# Altium PCB NODE_PCB.PcbDoc
Units mm, origin at the board's own origin, x right, y up, seen from the top; angles counter-clockwise.
Board outline 50 x 50 mm, 4 copper layers (L1 (Signal), L2 (GND), L3 (+3V3), L4 (Signal)), stack 1.586 mm thick; 70 components, 43 nets, 244 pads, 96 vias.
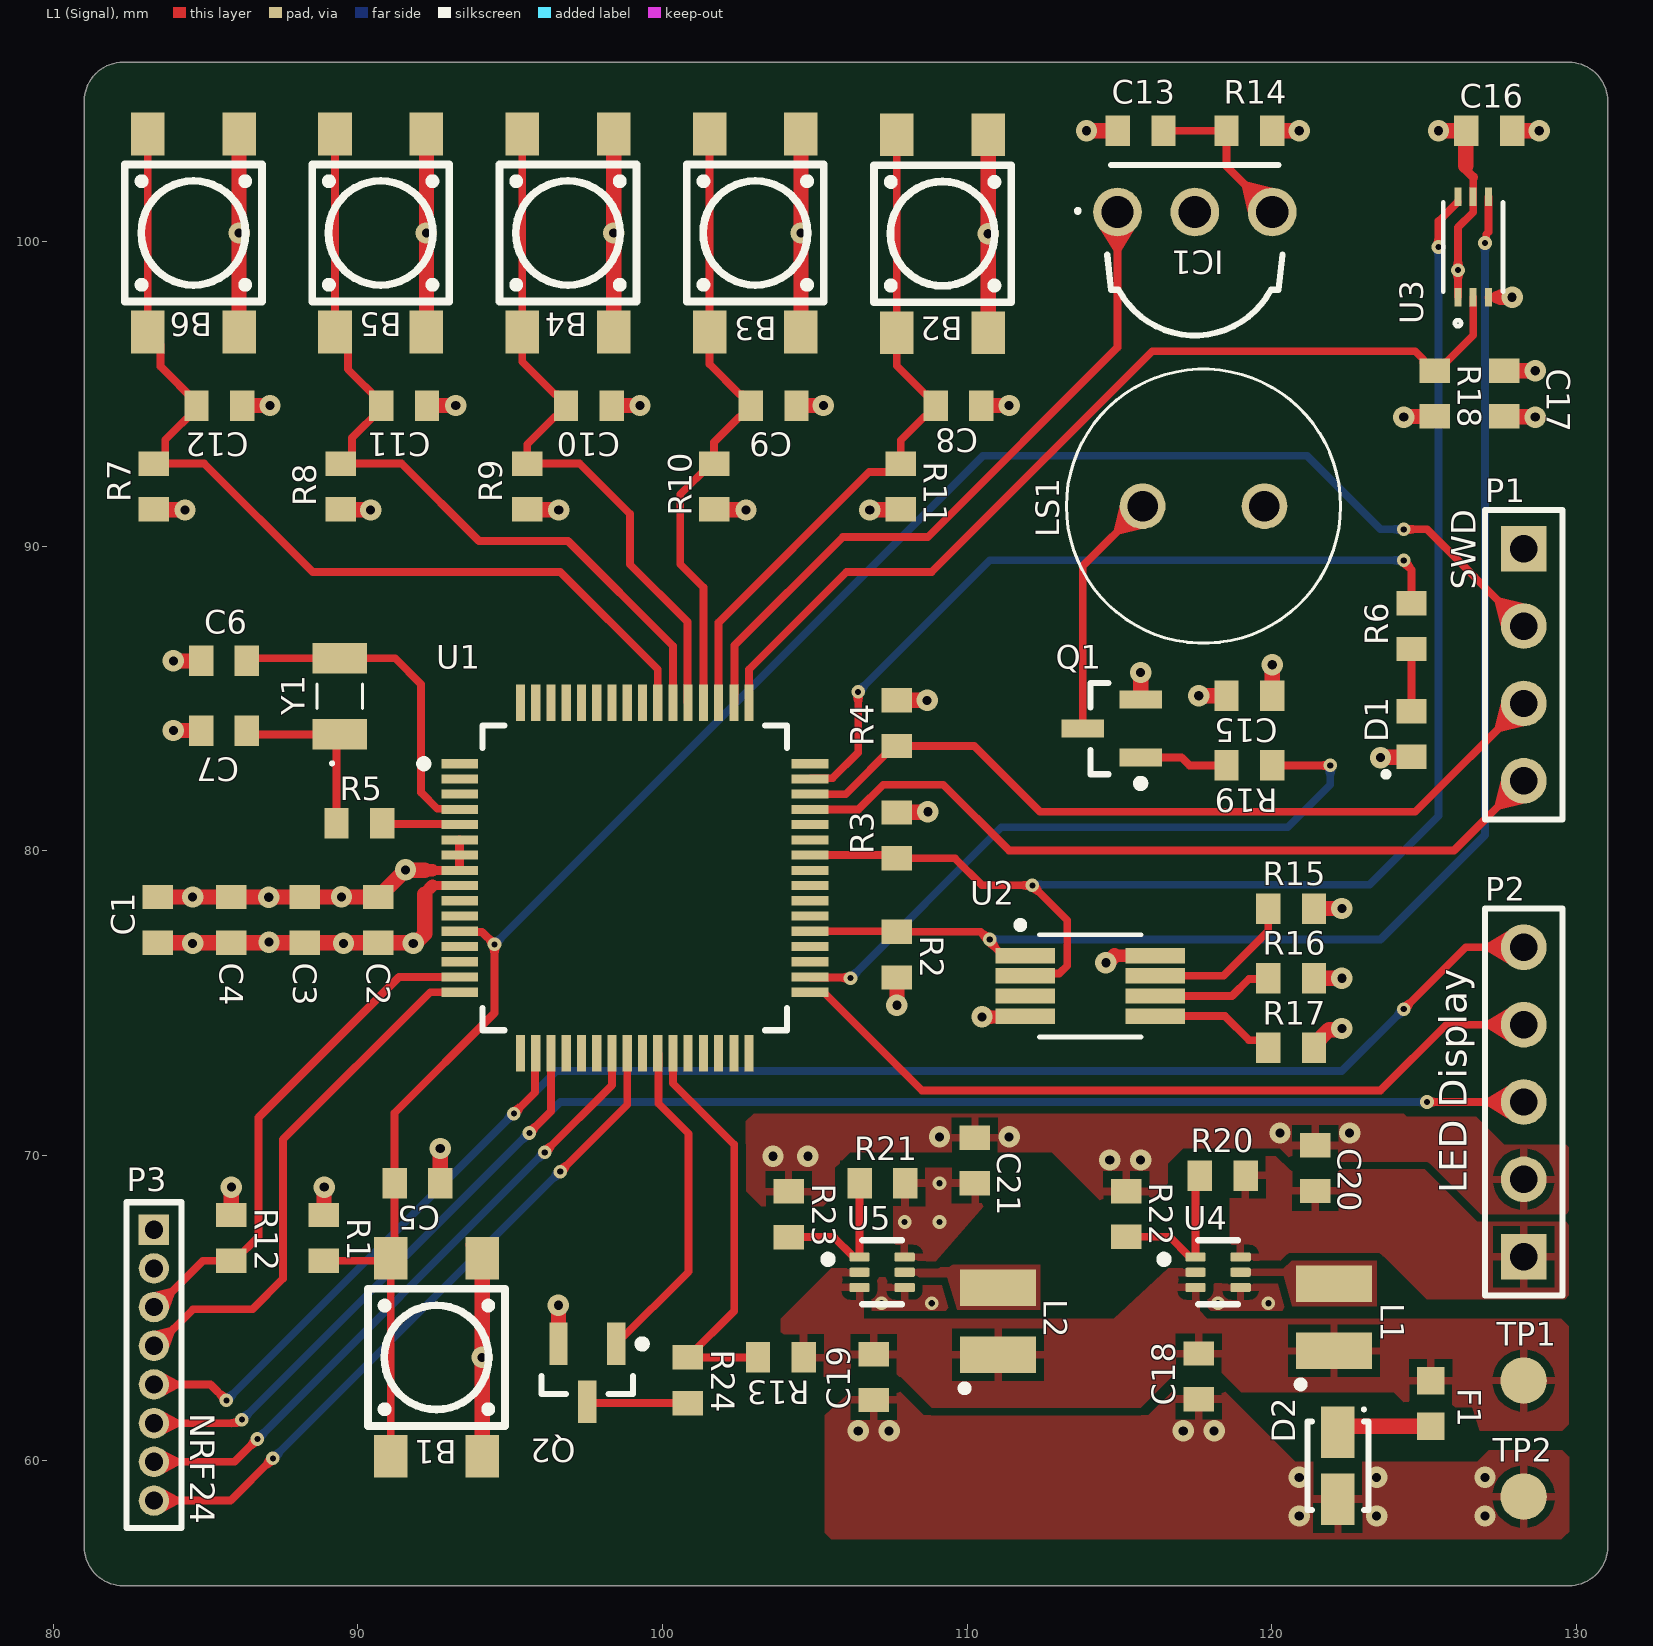
[diagram p0: L1 (Signal) view]
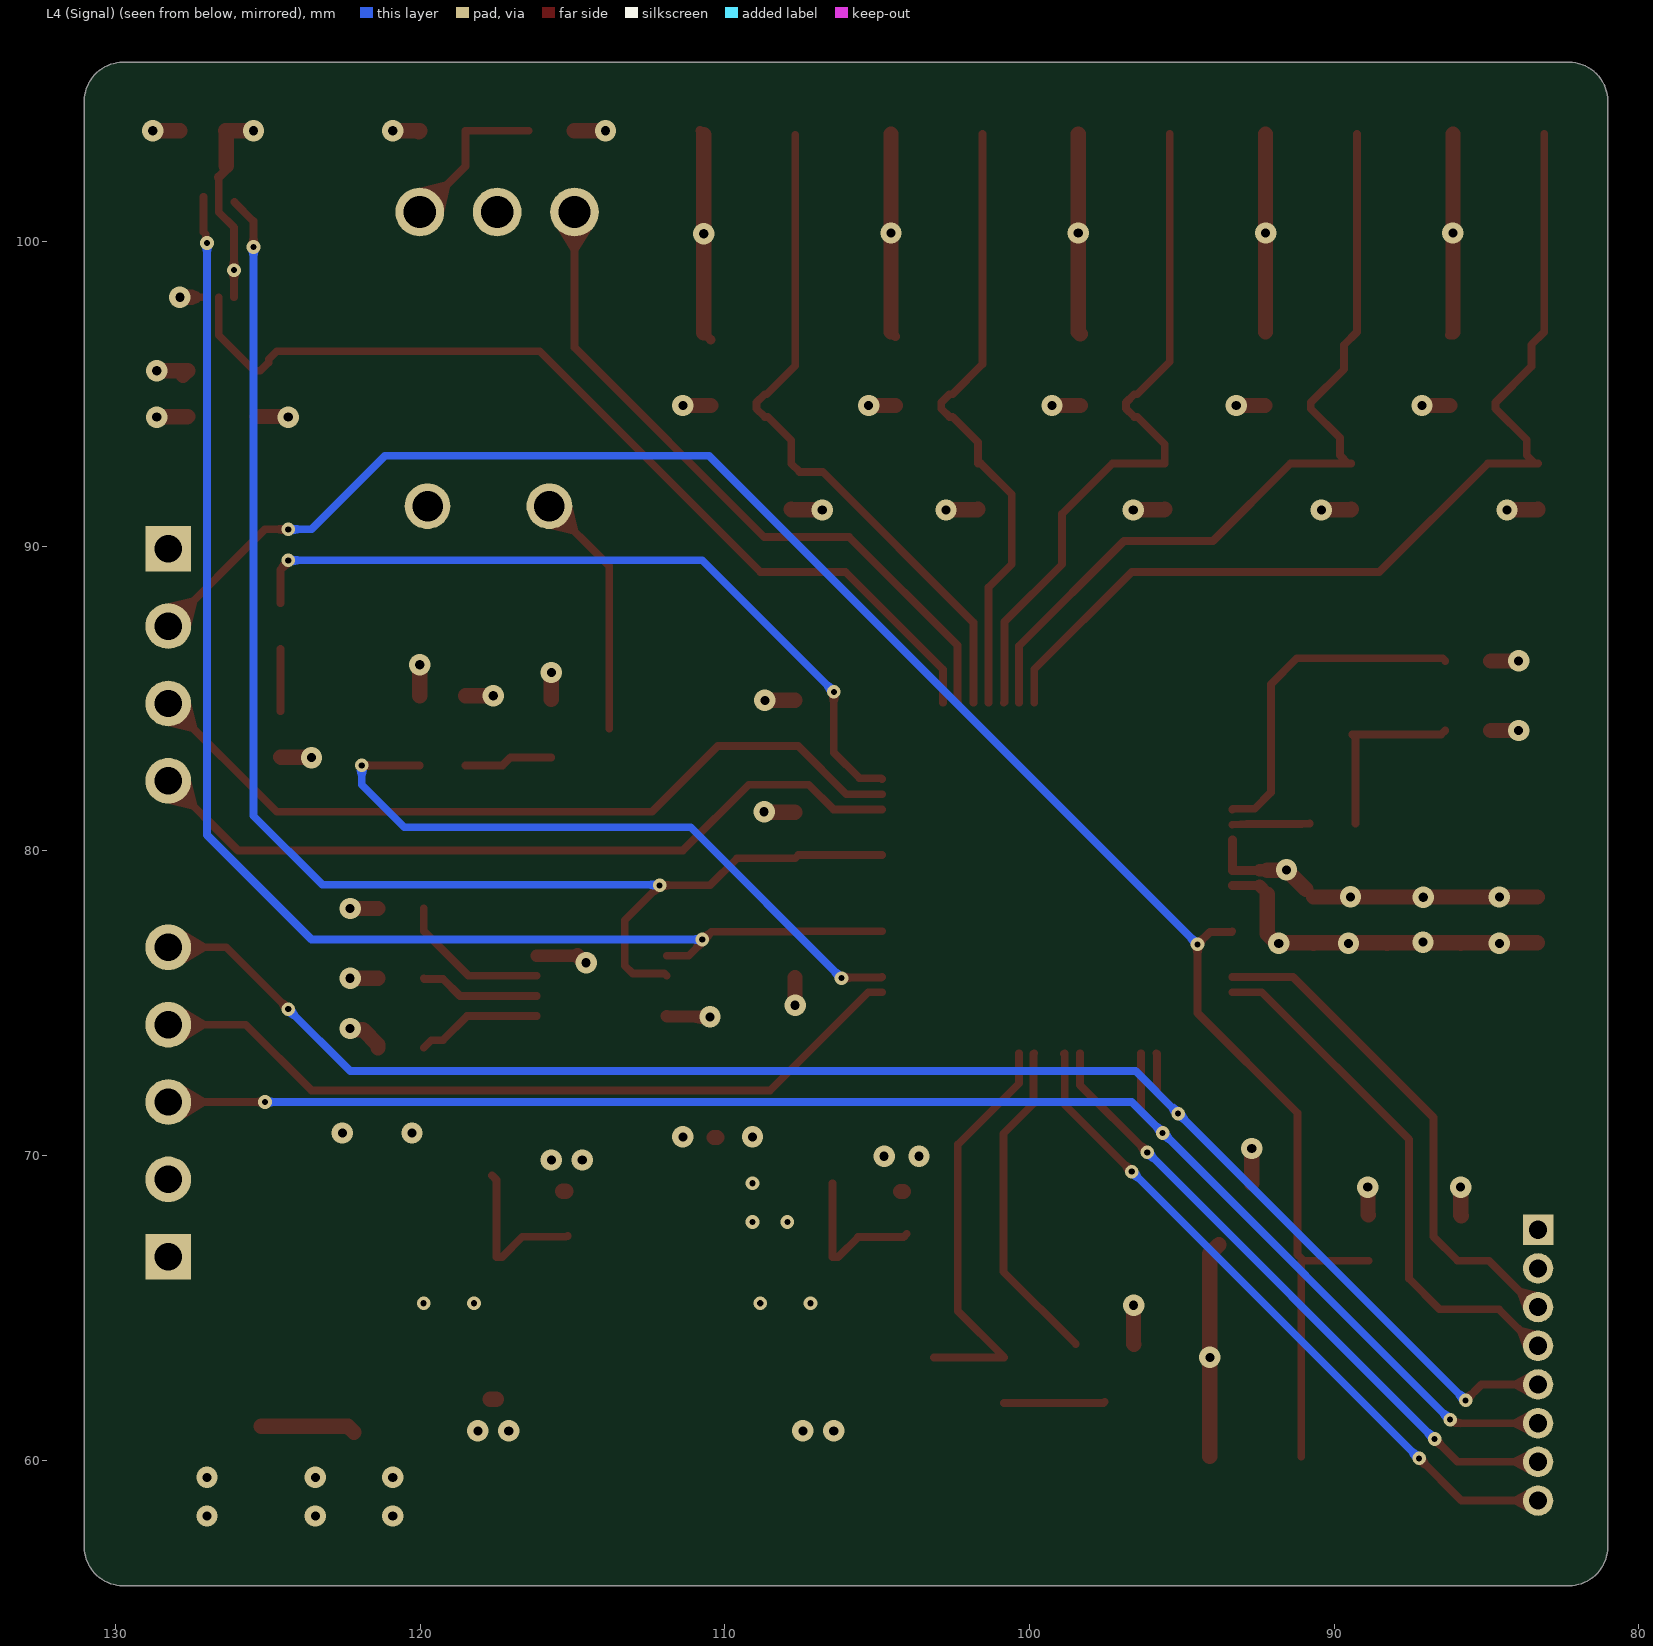
[diagram p1: L4 (Signal) view, seen from below]
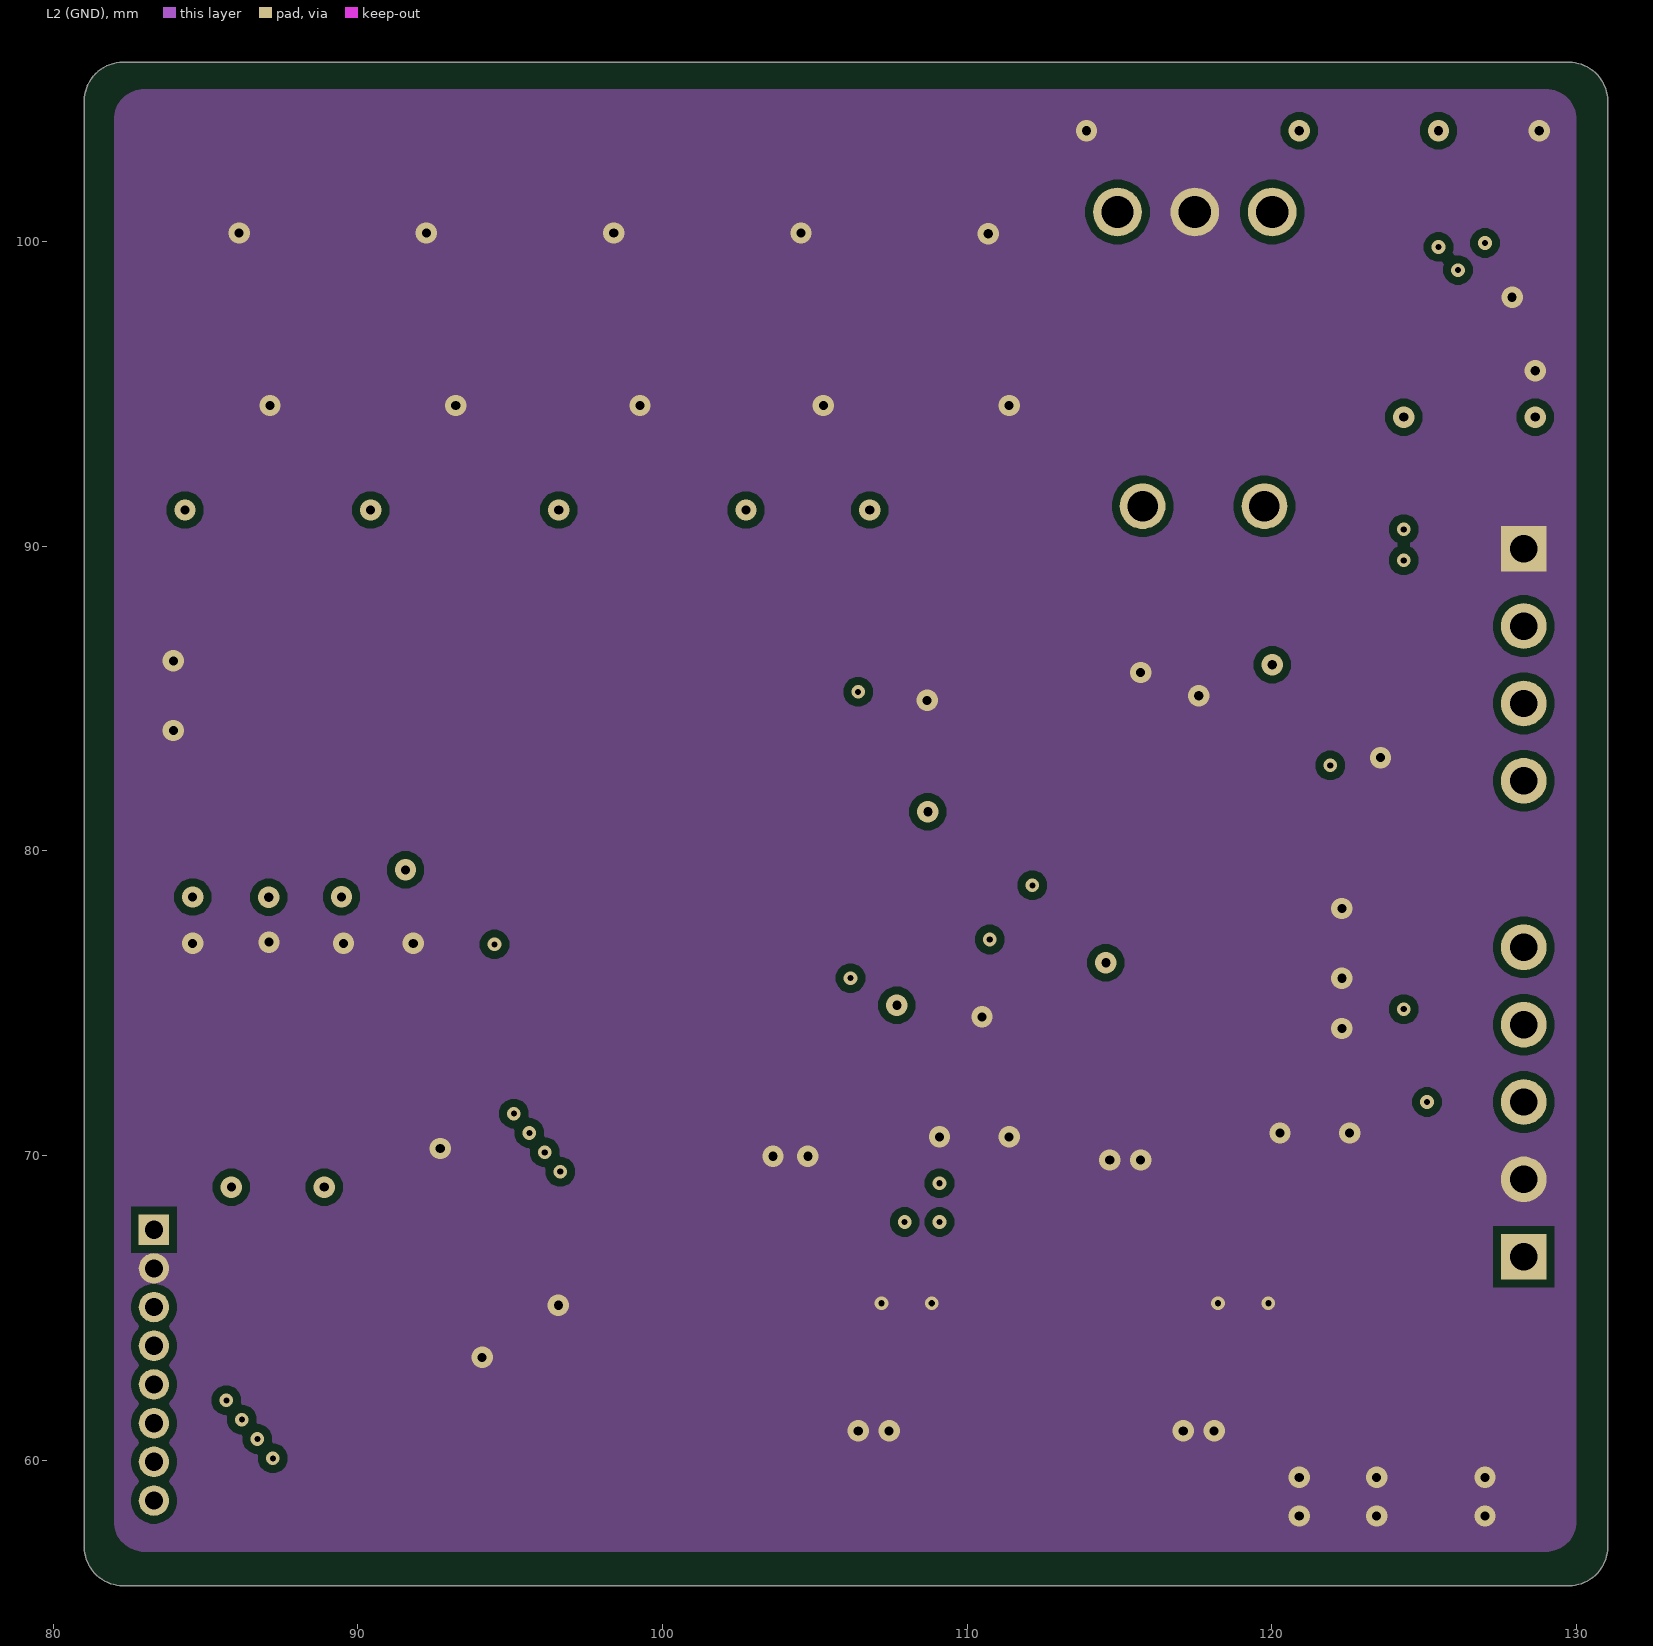
[diagram p2: L2 (GND)]
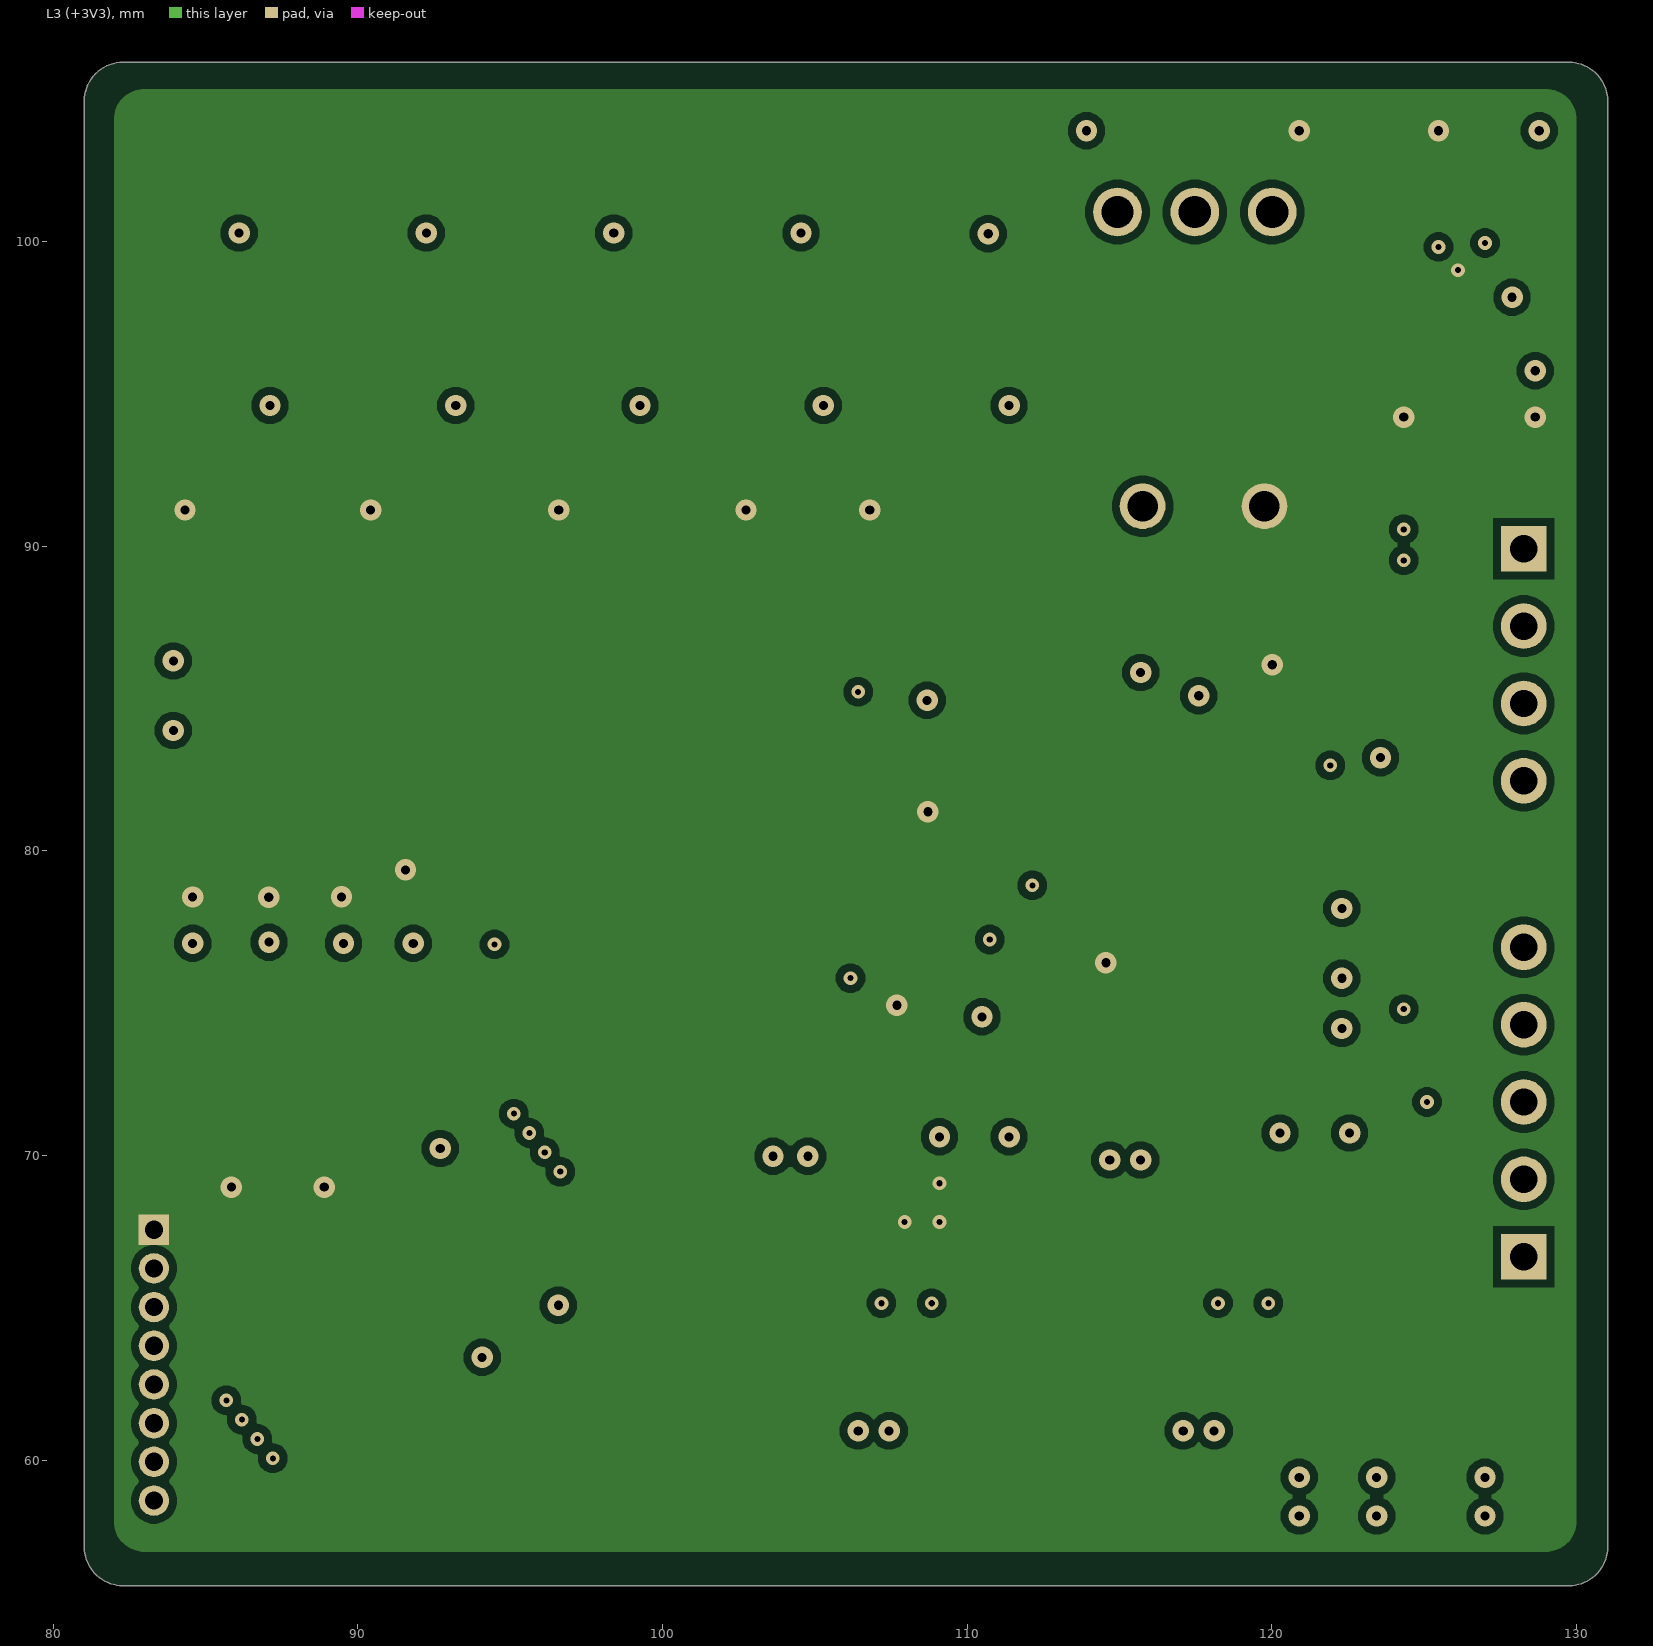
[diagram p3: L3 (+3V3)]
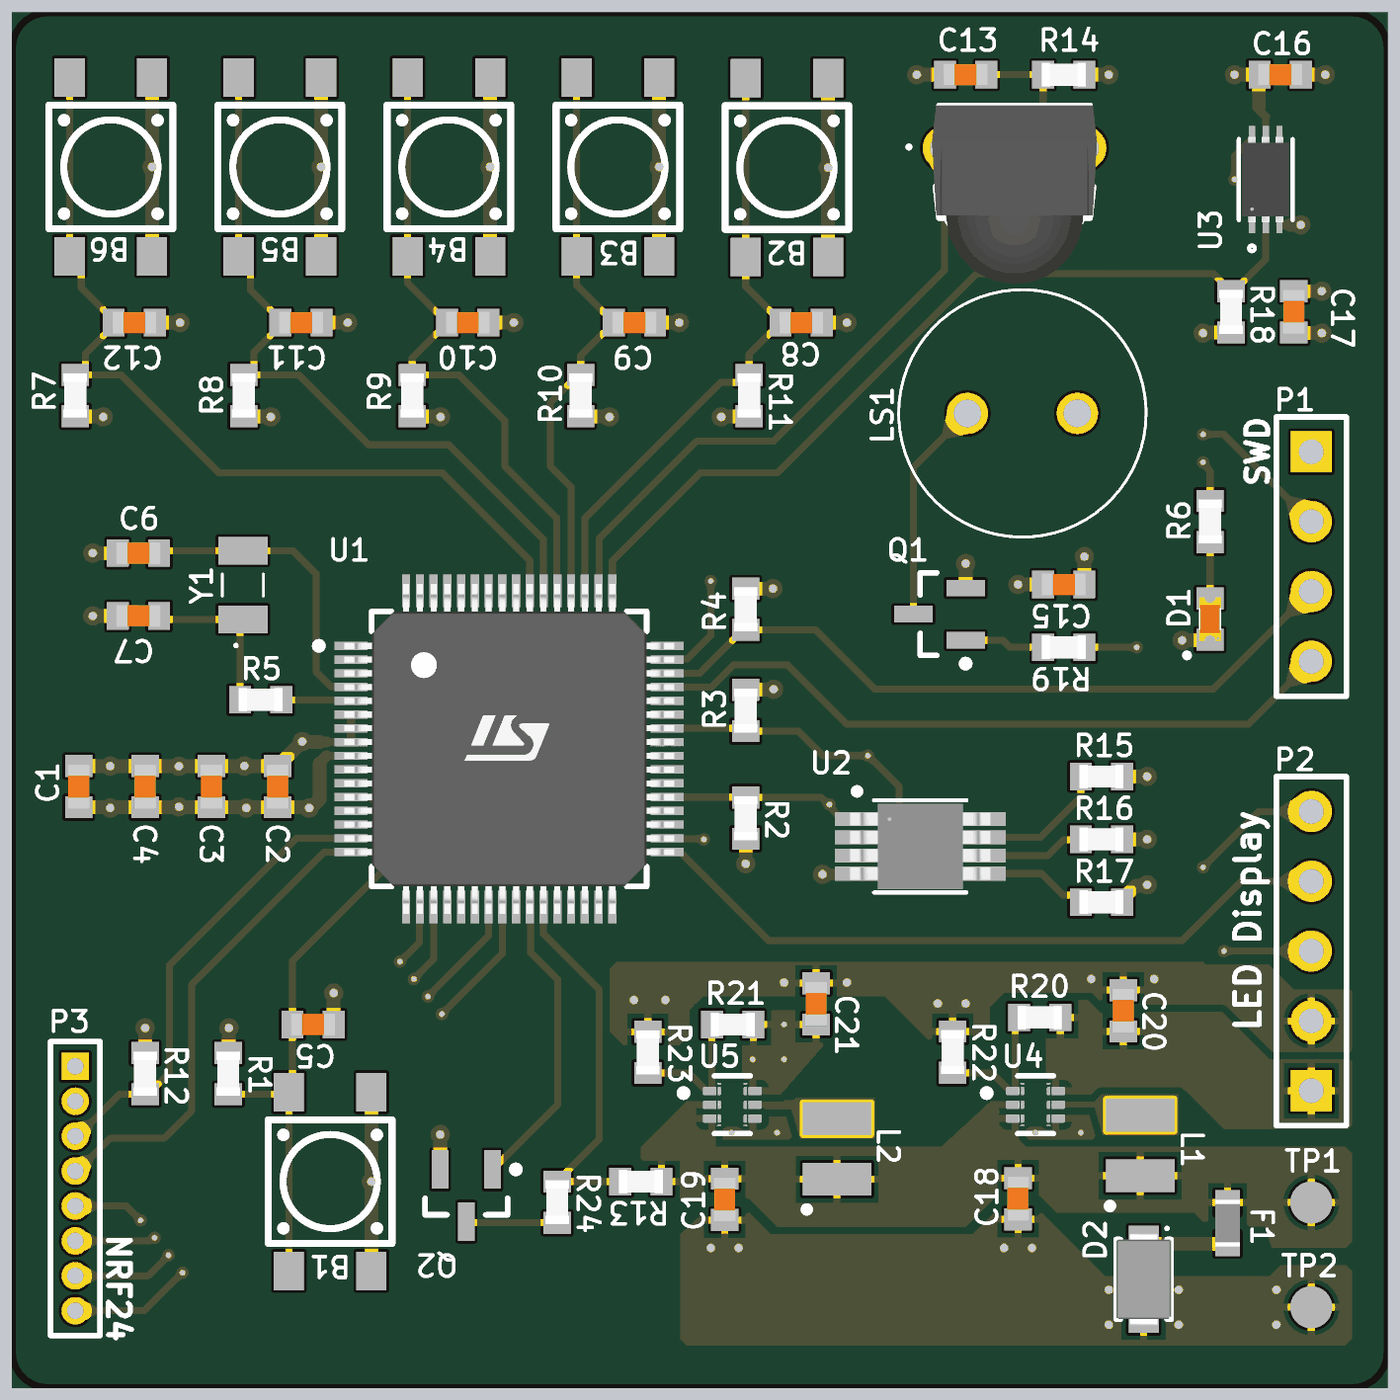
[diagram p4: 3D render of the assembled board from above, using the file's embedded part models]

## Layer stack, top to bottom
Top Solder: solder mask 0.0254, SM-001, Dk 4
L1 (Signal): signal copper 0.035
Dielectric 1: prepreg 0.2104, PP-017, Dk 4.6
L2 (GND): signal copper 0.0152
Dielectric 3: core 1.065, Core-039, Dk 4.6
L3 (+3V3): signal copper 0.0152
Dielectric 5: prepreg 0.2104, PP-017, Dk 4.6
L4 (Signal): signal copper 0.035
Bottom Solder: solder mask 0.0254, SM-001, Dk 4

## Board outline
81.026,57.15 81.026,104.61 cw(c82.296,104.61) 82.296,105.88 129.756,105.88 cw(c129.756,104.61) 131.026,104.61 131.026,57.15 cw(c129.756,57.15) 129.756,55.88 82.296,55.88 cw(c82.296,57.15)

## Design rules (kind name [scope] priority, off if disabled: settings)
BoardOutlineClearance [All] p1: gap=0.2 ignorepadtopadclearanceinfootprint=FALSE except(0: Arc-SplitContinuation Track-SplitContinuation SMDPad-SplitContinuation THPad-SplitContinuation Via-SplitContinuation Fill-SplitContinuation Poly-SplitContinuation Region-SplitContinuation Text-SplitContinuation)
Clearance [All] p1: gap=0.254 ignorepadtopadclearanceinfootprint=FALSE except(0: Arc-Hole Track-Hole SMDPad-Hole THPad-Hole Via-Hole Fill-Hole Poly-Hole Region-Hole Text-Hole; 0.089: Arc-Arc Arc-Track Track-Track; 0.127: SMDPad-SMDPad; 0.2: Arc-SMDPad Track-SMDPad THPad-THPad; 0.33: Arc-THPad Track-THPad)
DiffPairsRouting [All] p1: maxlimit=0.254 minlimit=0.203 mostfreqgap=0.254 toplayer_maxgap=0.203 toplayer_prefgap=0.203 toplayer_minwidth=0.271 toplayer_maxwidth=0.271 toplayer_prefwidth=0.271 bottomlayer_maxgap=0.203 bottomlayer_prefgap=0.203 bottomlayer_minwidth=0.271 bottomlayer_maxwidth=0.271 bottomlayer_prefwidth=0.271 impedanceprofiledriven=TRUE impedanceprofileid={2E16CEB6-7EED-42DB-A29F-F6CEBC16EF5B} impedanceprofilevalue=90.000000 maxuncoupledlength=12.7
HoleSize [All] p1: absolutevalues=TRUE maxlimit=6.3 minlimit=0.2 maxpercent=80.000 minpercent=20.000
MinimumSolderMaskSliver [All] p1: minsoldermaskwidth=0.2
PolygonConnect PolygonConnect_4 [All vs IsNamedPolygon('+3V3_L03_P011')] p1: thpad.connectstyle=Direct thpad.reliefconductorwidth=0.254 thpad.reliefentries=4 thpad.polygonreliefangle="90 Angle" thpad.airgapwidth=0.254 smdpad.connectstyle=Relief smdpad.reliefconductorwidth=0.254 smdpad.reliefentries=4 smdpad.polygonreliefangle="90 Angle" smdpad.airgapwidth=0.254 via.connectstyle=Direct via.reliefconductorwidth=0.254 via.reliefentries=4 via.polygonreliefangle="90 Angle" via.airgapwidth=0.254
PolygonConnect PolygonConnect_3 [All vs IsNamedPolygon('GND_L02_P010')] p2: thpad.connectstyle=Direct thpad.reliefconductorwidth=0.254 thpad.reliefentries=4 thpad.polygonreliefangle="90 Angle" thpad.airgapwidth=0.254 smdpad.connectstyle=Relief smdpad.reliefconductorwidth=0.254 smdpad.reliefentries=4 smdpad.polygonreliefangle="90 Angle" smdpad.airgapwidth=0.254 via.connectstyle=Direct via.reliefconductorwidth=0.254 via.reliefentries=4 via.polygonreliefangle="90 Angle" via.airgapwidth=0.254
PolygonConnect PolygonConnect_2 [All vs IsNamedPolygon('TPS61023DRLR_3V3_SW_L01_P004')] p3: thpad.connectstyle=Relief thpad.reliefconductorwidth=0.254 thpad.reliefentries=4 thpad.polygonreliefangle="90 Angle" thpad.airgapwidth=0.254 smdpad.connectstyle=Direct smdpad.reliefconductorwidth=0.254 smdpad.reliefentries=4 smdpad.polygonreliefangle="90 Angle" smdpad.airgapwidth=0.254 via.connectstyle=Relief via.reliefconductorwidth=0.254 via.reliefentries=4 via.polygonreliefangle="90 Angle" via.airgapwidth=0.254
PolygonConnect PolygonConnect_1 [All vs IsNamedPolygon('TPS61023DRLR_5V_SW_L01_P000')] p4: thpad.connectstyle=Relief thpad.reliefconductorwidth=0.254 thpad.reliefentries=4 thpad.polygonreliefangle="90 Angle" thpad.airgapwidth=0.254 smdpad.connectstyle=Direct smdpad.reliefconductorwidth=0.254 smdpad.reliefentries=4 smdpad.polygonreliefangle="90 Angle" smdpad.airgapwidth=0.254 via.connectstyle=Relief via.reliefconductorwidth=0.254 via.reliefentries=4 via.polygonreliefangle="90 Angle" via.airgapwidth=0.254
PolygonConnect [All] p5: thpad.connectstyle=Relief thpad.reliefconductorwidth=0.254 thpad.reliefentries=4 thpad.polygonreliefangle="90 Angle" thpad.airgapwidth=0.254 smdpad.connectstyle=Relief smdpad.reliefconductorwidth=0.254 smdpad.reliefentries=4 smdpad.polygonreliefangle="90 Angle" smdpad.airgapwidth=0.254 via.connectstyle=Direct via.reliefconductorwidth=0.254 via.reliefentries=4 via.polygonreliefangle="90 Angle" via.airgapwidth=0.254
RoutingVias [All] p1: holewidth=0.2 width=0.4 viastyle="Through Hole" minholewidth=0.2 minwidth=0.4 maxholewidth=0.711 maxwidth=1.27
SolderMaskExpansion SolderMaskExpansion_via [IsVia] p1: expansion=0.102 istentingtop=TRUE
SolderMaskExpansion [All] p2: expansion=0.102 istentingtop=FALSE
UnRoutedNet [All] p1: checkbadconnections=TRUE
Width [All] p1: maxlimit=1 minlimit=0.09 preferedwidth=0.3 midlayer1_minwidth=0.254 midlayer1_maxwidth=0.254 midlayer1_prefwidth=0.254 midlayer2_minwidth=0.254 midlayer2_maxwidth=0.254 midlayer2_prefwidth=0.254 minimp=50.000000 maximp=50.000000 favimp=50.000000
26 further rules are at their usual default settings.

## Components (designator, comment, footprint, x,y, rotation, side; value= is the part's Value field where it differs from the comment)
B1 "TS-1109S-C-A" SMD_BUTTON 92.583,63.373 r270 top
B2 "TS-1109S-C-A" SMD_BUTTON 109.196,100.255 r90 top
B3 "TS-1109S-C-A" SMD_BUTTON 103.048,100.278 r90 top
B4 "TS-1109S-C-A" SMD_BUTTON 96.901,100.278 r90 top
B5 "TS-1109S-C-A" SMD_BUTTON 90.753,100.278 r90 top
B6 "TS-1109S-C-A" SMD_BUTTON 84.606,100.278 r90 top
C1 "2.2u" CAP_0603 83.439,77.736 r90 top
C2 "100n" CAP_0603 90.678,77.736 r90 top
C3 "100n" CAP_0603 88.265,77.736 r90 top
C4 "100n" CAP_0603 85.852,77.736 r90 top
C5 "100n" CAP_0603 91.96,69.088 r180 top
C6 "15p" CAP_0603 85.61,86.233 r0 top
C7 "15p" CAP_0603 85.61,83.947 r0 top
C8 "100nF" CAP_0603 109.716,94.615 r0 top
C9 "100nF" CAP_0603 103.652,94.615 r0 top
C10 "100nF" CAP_0603 97.587,94.615 r0 top
C11 "100nF" CAP_0603 91.523,94.615 r0 top
C12 "100nF" CAP_0603 85.459,94.615 r0 top
C13 "4.7u" CAP_0603 115.697,103.632 r0 top
C15 "10u" CAP_0603 119.265,85.09 r180 top
C16 "1u" CAP_0603 127.139,103.632 r180 top
C17 "1u" CAP_0603 127.635,95.008 r270 top
C18 "10u" CAP_0603 117.602,62.75 r90 top
C19 "10u" CAP_0603 106.934,62.726 r90 top
C20 "10u" CAP_0603 121.428,69.584 r270 top
C21 "10u" CAP_0603 110.258,69.838 r270 top
D1 "RED" LED_0603_RED 124.587,83.832 r90 top
D2 "D_TVS_0603" DIOM2718X14N 122.174,59.817 r270 top
F1 "T0603HI2000TM" RESC1608X06N 125.222,61.861 r270 top
IC1 "TSOP34838" TSOP4856 117.475,100.965 r0 top
L1 "1u" IND_1210 122.047,64.686 r90 top
L2 "1u" IND_1210 111.02,64.559 r90 top
LS1 "BMT0903H5.5" BMT0903H5.5 119.761,91.313 r180 top
P1 "SWD" HDR1X4 128.27,89.916 r270 top
P2 "Header 5" HDR1X5 128.27,66.675 r90 top
P3 "NRF24L01" MHDR1X8 83.312,67.564 r270 top
Q1 "SI2302DS,215" NXP-SOT23_N 114.747,84.013 r180 top
Q2 "SI2302DS,215" NXP-SOT23_N 97.536,62.865 r270 top
R1 "10k" RES_0603 88.879,67.298 r90 top
R2 "4.7k" RES_0603 107.696,76.593 r90 top
R3 "4.7k" RES_0603 107.696,80.506 r270 top
R4 "10k" RES_0603 107.696,84.189 r90 top
R5 "0R" RES_0603 90.055,80.899 r180 top
R6 "1k" RES_0603 124.587,87.376 r90 top
R7 "100k" RES_0603 83.312,91.96 r270 top
R8 "100k" RES_0603 89.44,91.96 r270 top
R9 "100k" RES_0603 95.567,91.96 r270 top
R10 "100k" RES_0603 101.695,91.96 r270 top
R11 "100k" RES_0603 107.823,91.96 r270 top
R12 "10k" RES_0603 85.852,67.298 r270 top
R13 "10k" RES_0603 103.886,63.373 r0 top
R14 "100" RES_0603 119.265,103.632 r180 top
R15 "100k" RES_0603 120.638,78.105 r0 top
R16 "100k" RES_0603 120.638,75.819 r0 top
R17 "100k" RES_0603 120.638,73.533 r0 top
R18 "100k" RES_0603 125.349,95.008 r90 top
R19 "100" RES_0603 119.265,82.804 r180 top
R20 "750k" RES_0603 118.392,69.342 r0 top
R21 "430k" RES_0603 107.222,69.088 r0 top
R22 "100k" RES_0603 115.225,68.079 r270 top
R23 "100k" RES_0603 104.14,68.072 r270 top
R24 "10k" RES_0603 100.838,62.623 r90 top
TP1 "TestPoint" SOLDERINGPAD 128.27,62.611 r0 top
TP2 "TestPoint" SOLDERINGPAD 128.27,58.801 r90 top
U1 "STM32G070RBT6" FP-LQFP64-5W-MFG 99.095,79.109 r0 top
U2 "LM75BDP" TSSOP8_3P1X3P1_NXP-M 114.046,75.565 r0 top
U3 "BH1730FVC-TR" SON_30FVC-TR_ROM-M 126.611,99.819 r90 top
U4 "TPS61023DRLR" FP-DRL0006A-MFG 118.237,66.167 r0 top
U5 "TPS61023DRLR" FP-DRL0006A-MFG 107.21,66.167 r0 top
Y1 "Q13FC1350000400" Q13FC1350000400 89.408,85.07 r90 top

## Footprints (in the part's own frame and the unit in brackets; to place one, negate y for a bottom-side part, rotate by r counter-clockwise, add the part's x,y. Pads: shape width x height; smd on the part's side, far side on the other; paste and mask are expansions set on the pad)
BMT0903H5.5 [mm]
  round 1.5 hole 1: 1(0,0) 2(4,0)
  silkscreen extent -2.5,-4.5 6.5,4.5
CAP_0603 [mm]
  rect 0.8x1 smd: 1(-0.75,0) 2(0.75,0)
  body extent -0.8,-0.4 0.8,0.4, height 0.51
DIOM2718X14N [mm] "Molded Diode, 2-Leads, Body 2,70x1,80mm, IPC Medium Density"
  rect 1.7x1.1 smd: 1(-1.1,0) 2(1.1,0)
  silkscreen extent -1.9,-1 1.45,1, body extent -1.67,-1 1.67,1, height 1.35
FP-DRL0006A-MFG [mm]
  rrect33% 0.67x0.3 smd paste+0 mask+0: 1(-0.74,0.5) 2(-0.74,0) 3(-0.74,-0.5) 4(0.74,-0.5) 5(0.74,0) 6(0.74,0.5)
  silkscreen extent -1.9,-1.05 0.65,1.05, body extent -1.17,-1.1 1.17,1.1, height 0.25
FP-LQFP64-5W-MFG [mm]
  rect 1.2x0.3 smd paste+0 mask+0: 1(-5.75,3.75) 2(-5.75,3.25) 3(-5.75,2.75) 4(-5.75,2.25) 5(-5.75,1.75) 6(-5.75,1.25) 7(-5.75,0.75) 8(-5.75,0.25) 9(-5.75,-0.25) 10(-5.75,-0.75) 11(-5.75,-1.25) 12(-5.75,-1.75) 13(-5.75,-2.25) 14(-5.75,-2.75) 15(-5.75,-3.25) 16(-5.75,-3.75) 33(5.75,-3.75) 34(5.75,-3.25) 35(5.75,-2.75) 36(5.75,-2.25) 37(5.75,-1.75) 38(5.75,-1.25) 39(5.75,-0.75) 40(5.75,-0.25) 41(5.75,0.25) 42(5.75,0.75) 43(5.75,1.25) 44(5.75,1.75) 45(5.75,2.25) 46(5.75,2.75) 47(5.75,3.25) 48(5.75,3.75)
  rect 0.3x1.2 smd paste+0 mask+0: 17(-3.75,-5.75) 18(-3.25,-5.75) 19(-2.75,-5.75) 20(-2.25,-5.75) 21(-1.75,-5.75) 22(-1.25,-5.75) 23(-0.75,-5.75) 24(-0.25,-5.75) 25(0.25,-5.75) 26(0.75,-5.75) 27(1.25,-5.75) 28(1.75,-5.75) 29(2.25,-5.75) 30(2.75,-5.75) 31(3.25,-5.75) 32(3.75,-5.75) 49(3.75,5.75) 50(3.25,5.75) 51(2.75,5.75) 52(2.25,5.75) 53(1.75,5.75) 54(1.25,5.75) 55(0.75,5.75) 56(0.25,5.75) 57(-0.25,5.75) 58(-0.75,5.75) 59(-1.25,5.75) 60(-1.75,5.75) 61(-2.25,5.75) 62(-2.75,5.75) 63(-3.25,5.75) 64(-3.75,5.75)
  silkscreen extent -7.05,-5 5,5, body extent -6.45,-6.45 6.45,6.45, height 0.25
HDR1X4 [mm] "Connector; Header; 4 Position"
  rect 1.5x1.5 hole 0.9: 1(0,0)
  round 1.5 hole 0.9: 2(2.54,0) 3(5.08,0) 4(7.62,0)
  silkscreen extent -1.27,-1.27 8.89,1.27
HDR1X5 [mm] "Connector; Header; 5 Position"
  rect 1.5x1.5 hole 0.9: 1(0,0)
  round 1.5 hole 0.9: 2(2.54,0) 3(5.08,0) 4(7.62,0) 5(10.16,0)
  silkscreen extent -1.27,-1.27 11.43,1.27
IND_1210 [mm]
  rect 1.2x2.5 smd: 1(-1.1,0) 2(1.1,0)
  silkscreen extent -2.3,1 -2.1,1.2
LED_0603_RED [mm]
  rect 0.8x1 smd: A(0.75,0) K(-0.75,0)
  silkscreen extent -1.37,0.79 -1.27,0.89, body extent -0.8,-0.4 0.8,0.4, height 0.6
MHDR1X8 [mm] "Connector; Header; 8 Position"
  rect 1x1 hole 0.6: 1(0,0)
  round 1 hole 0.6: 2(1.27,0) 3(2.54,0) 4(3.81,0) 5(5.08,0) 6(6.35,0) 7(7.62,0) 8(8.89,0)
  silkscreen extent -0.9,-0.9 9.79,0.9
NXP-SOT23_N [mm] "SOT23, 3-Leads, Body 3x1.4mm, Pitch 0.95mm, IPC Medium Density"
  rect 1.4x0.6 smd: 1(-0.95,0.95) 2(-0.95,-0.95) 3(0.95,0)
  silkscreen extent -1.08,-1.5 0.7,1.92, body extent -0.7,-1.5 0.7,1.5, height 1.1
Q13FC1350000400 [mm]
  rect 1x1.8 smd: 1(-1.25,0) 2(1.25,0)
  silkscreen extent -2.25,-0.75 0.4,0.75
RES_0603 [mm]
  rect 0.8x1 smd: 1(-0.75,0) 2(0.75,0)
  body extent -0.8,-0.43 0.8,0.43, height 0.52
RESC1608X06N [mm] "Chip Resistor, 2-Leads, Body 1,60x0,80mm, IPC Medium Density"
  rect 0.9x0.9 smd: 1(-0.75,0) 2(0.75,0)
  body extent -0.85,-0.45 0.85,0.45, height 0.6
SMD_BUTTON [mm]
  rect 1.4x1.1 smd: 1(-3.25,1.5) 2(3.25,1.5) 3(-3.25,-1.5) 4(3.25,-1.5)
  silkscreen extent -2.25,-2.25 2.25,2.25
SOLDERINGPAD [mil]
  round 60 smd: 1(0,0)
SON_30FVC-TR_ROM-M [mm]
  rect 0.603x0.229 smd paste+0 mask+0: 1(-1.648,0.5) 2(-1.648,0) 3(-1.648,-0.5) 4(1.648,-0.5) 5(1.648,0) 6(1.648,0.5)
  silkscreen extent -2.6,-0.98 1.47,0.98, body extent -1.55,-0.85 1.55,0.85, height 0.76
TSOP4856 [mm]
  round 1.6 hole 1.06: 1(-2.54,0) 2(0,0) 3(2.54,0)
  silkscreen extent -3.87,-4.05 2.88,1.55, body extent -3,-4.95 3,1.55, height 10.46
TSSOP8_3P1X3P1_NXP-M [mil]
  rect 77x20 smd paste+0 mask+0: 1(-84,39) 2(-84,13) 3(-84,-13) 4(-84,-39) 5(84,-39) 6(84,-13) 7(84,13) 8(84,39)
  silkscreen extent -94,-66 66,83, body extent -101,-61 101,61, height 43

## Part data
B1 B2 B3 B4 B5 B6: "Basic SMD button", Manufacturer="XKB Connectivity", Datasheet=https://datasheet.lcsc.com/lcsc/2110151730_XKB-Connectivity-TS-1109S-C-A_C397346.pdf, Manufacturer Part Number=TS-1109S-C-A
C1 C2 C3 C4 C5 C6 C7 C8 C9 C10 C11 C12 C13 C15 C16 C17 C18 C19 C20 C21: library part CAP_0603_10V, "Capacitor SMD 0603 10V"
D1: library part LED_0603_RED, "LED 0603 RED SMD"
D2: "Diode TVS / ESD 0603"
F1: library part FUSE_0603, "Fuse SMD 0603", Manufacturer=AEM, Datasheet=https://datasheet.lcsc.com/lcsc/1811151158_AEM-T0603HI2000TM_C311070.pdf, Manufacturer Part Number=T0603HI2000TM
IC1: "Integrated Circuit", Manufacturer_Name=Vishay, Mouser Part Number=782-TSOP34838, Arrow Part Number=TSOP34838, Arrow Price/Stock=https://www.arrow.com/en/products/tsop34838/vishay?region=europe, Datasheet Link=https://www.vishay.com/docs/82489/tsop322.pdf, Manufacturer_Part_Number=TSOP34838, Mouser Price/Stock=https://www.mouser.co.uk/ProductDetail/Vishay-Semiconductors/TSOP34838?qs=mI1nX2bqwFnDB6kD41OpRA%3D%3D
L1 L2: library part IND_1210, "Inductor SMD 1210"
LS1: "Loudspeaker or Buzzer", Manufacturer=BESTAR,LOUDITY, Datasheet Link=https://www.hestore.hu/prod_getfile.php?id=4603, Height=5.5mm, Manufacturer Part Number=BMT0903H5.5
P1: library part "Header 4", "Header, 4-Pin", LatestRevisionDate=17-Jul-2002, LatestRevisionNote="Re-released for DXP Platform.", Publisher="Altium Limited"
P2: "Header, 5-Pin", LatestRevisionDate=17-Jul-2002, LatestRevisionNote="Re-released for DXP Platform.", Publisher="Altium Limited"
P3: library part MHDR1X8, "Header, 8-Pin", LatestRevisionDate=17-Jul-2002, LatestRevisionNote="Re-released for DXP Platform.", Publisher="Altium Limited"
Q1 Q2: library part CMP-1258-00133-1, "N-Channel Enhancement Mode Field-Effect Transistor, 20 V, 2.5 A, 3-Pin SOT23, Tape and Reel", Manufacturer="NXP Semiconductors", Channel Type=N, Ciss [typ] (pF)=230, Code_JEDEC=TO-236AB, ComponentLink1Description="Manufacturer URL", ComponentLink1URL=http://www.nxp.com/, ComponentLink2Description=Datasheet, ComponentLink2URL=http://www.nxp.com/documents/data_sheet/SI2302DS.pdf, ComponentLink3Description="Package Specification", ComponentLink3URL=http://www.nxp.com/documents/outline_drawing/sot023_po.pdf, Coss [typ] (pF)=125, DatasheetVersion="Rev. 02", ID [max] (A)=2.5, Mounting Technology="Surface Mount", PackageDescription="3-Pin Small Outline Transistor Package, Body 2.9 x 1.3 mm, Pitch 0.95 mm", PackageReference=SOT23, PackageVersion="06-03-16, 03/2006", Packing="Tape & Reel", PartNumber=SI2302DS,215, VDS [max] (V)=20
R1 R2 R3 R4 R5 R6 R7 R8 R9 R10 R11 R12 R13 R14 R15 R16 R17 R18 R19 R20 R21 R22 R23 R24: library part RES_0603, "Resistor SMD 0603"
U1: library part CMP-12105-000143-1, "IC MCU 32BIT 128KB FLASH 64LQFP", RoHS Compliant=Yes
U2: "No Description Available", Mfr_Name=NXP, Copyright="Copyright (C) 2022 Ultra Librarian. All rights reserved.", Manufacturer_Part_Number=LM75BDP, RefDes=RefDes, Type=DEV
U3: "Ambiant Light Sensor", Mfr_Name="ROHM Semiconductor", Copyright="Copyright (C) 2022 Ultra Librarian. All rights reserved.", Datasheet=https://datasheet.lcsc.com/lcsc/1808091713_ROHM-Semicon-BH1730FVC-TR_C79616.pdf, Manufacturer_Part_Number=BH1730FVC-TR, RefDes=RefDes, Type=DEV
U4 U5: library part CMP-04918-000638-1, "FINISH GOODS FOR TPS61023"
Y1: "Crystal or Oscillator", Manufacturer_Name="Seiko Instruments Inc.", Datasheet Link=https://datasheet.lcsc.com/szlcsc/1901081604_Seiko-Epson-Q13FC1350000400_C32346.pdf, Height=0.9mm, Manufacturer_Part_Number=Q13FC1350000400

## Via types
v1: diameter 0.7, hole 0.3, L1 (Signal) to L4 (Signal), tented both sides, 68 vias
v2: diameter 0.45, hole 0.2, L1 (Signal) to L4 (Signal), tented both sides, 28 vias

## Nets (pads, with @x,y where several pads share a name; then routed paths per layer and width w, separated by ;. In a path a pad name is that pad's centre, name@x,y a point inside that pad or via, vN(x,y) a via of type N, cw(c..) or ccw(c..) an arc to the next point about the centre after c; other vN are vias at no path point)
+3V3: C1.2 C2.2 C3.2 C4.2 C15.1 C16.2 C17.2 C21.2 LS1.1 P3.1 R1.2 R2.1 R3.1 R7.2 R8.2 R9.2 R10.2 R11.2 R12.1 R14.1 R18.1 R21.2 U1.6 U1.7 U1.8 U2.8 U3.1 U3.5 U5.6 | length 32.4
  L1 (Signal) w0.254: U3.1 126.111,100.457 126.611,100.957 U3.5 126.611,102.1 126.619,102.108
  L1 (Signal) w0.3: 92.456,79.359 U1.8 U1.7 U1.6 ; 126.365,102.489 126.365,102.362 126.619,102.108
  L1 (Signal) w0.4: 92.202,79.359 92.456,79.359 ; 114.837,76.556 U2.8
  L1 (Signal) w0.5: R7.2 83.324,91.198 84.316,91.198 v1(84.328,91.186) ; C1.2@83.339,78.486 C1.2 85.752,78.486 C4.2 C3.2 90.578,78.486 C2.2 ; R12.1@85.828,68.024 R12.1 v1(85.852,68.961) ; R1.2 88.889,68.059 88.889,68.95 v1(88.9,68.961) ; R8.2 89.452,91.198 90.412,91.198 v1(90.424,91.186) ; C2.2@90.928,78.736 91.551,79.359 92.202,79.359 ; R9.2 95.58,91.198 96.584,91.198 v1(96.596,91.186) ; R10.2 101.707,91.198 102.731,91.198 v1(102.743,91.186) ; v1(106.807,91.186) 106.819,91.198 107.811,91.198 R11.2 ; v1(107.696,74.93) R2.1 ; R3.1 107.708,81.268 108.7,81.268 v1(108.712,81.28) ; v1(114.554,76.327) 114.608,76.327 114.837,76.556 ; C15.1 v1(120.015,86.106) ; R14.1@120.048,103.599 R14.1 v1(120.904,103.632) ; v1(124.333,94.234) 124.357,94.258 R18.1 ; v1(125.476,103.632) C16.2 126.365,103.608 126.365,102.489 ; C17.2 127.647,94.246 128.639,94.246 v1(128.651,94.234)
  other v1: 84.582,78.486 87.08,78.478 89.465,78.489 91.567,79.375
  other v2: 107.95,67.818 109.093,67.818 109.093,69.088 126.111,99.06
+5: C20.2 P2.1 R20.2 U4.6
AA_Battery_+: C18.2 C19.2 F1.1 L1.1 L2.1 R13.2 TP1.1 U4.2 U4.3 U5.2 U5.3
ADC_FET3: Q2.3 R24.1 | length 3.3
  L1 (Signal) w0.254: Q2.3 97.578,61.873 R24.1
Button0: B2.1 B2.2 C8.1 R11.1 U1.51 | length 22.7
  L1 (Signal) w0.254: U1.51 101.845,87.494 106.788,92.437 107.55,92.437 R11.1 107.823,93.472 108.593,94.242 108.693,94.242 108.966,94.515 C8.1 108.966,94.715 108.693,94.988 108.632,94.988 107.696,95.924 B2.1 B2.2
Button1: B3.1 B3.2 C9.1 R10.1 U1.52 | length 20.7
  L1 (Signal) w0.254: U1.52 101.345,88.647 100.584,89.408 100.584,91.699 101.595,92.71 R10.1 101.695,93.408 102.529,94.242 102.629,94.242 102.902,94.515 102.902,94.715 102.629,94.988 102.529,94.988 101.548,95.968 B3.1 B3.2
Button2: B4.1 B4.2 C10.1 R9.1 U1.53 | length 23.1
  L1 (Signal) w0.254: B4.2 B4.1 95.401,96.052 96.464,94.988 96.564,94.988 96.837,94.715 C10.1 96.837,94.515 96.564,94.242 96.464,94.242 95.567,93.345 R9.1 97.282,92.71 98.933,91.059 98.933,89.408 100.822,87.519 100.822,85.452 100.822,84.882 U1.53
Button3: B5.1 B5.2 C11.1 R8.1 U1.54 | length 27.2
  L1 (Signal) w0.254: B5.2 B5.1 89.677,96.605 89.677,95.812 90.773,94.715 C11.1 90.773,94.515 89.813,93.555 89.813,92.983 R8.1@89.54,92.71 ; R8.1 R8.1@89.54,92.71 ; U1.54 100.345,86.726 96.901,90.17 93.98,90.17 91.44,92.71 R8.1@89.54,92.71
Button4: B6.1 B6.2 C12.1 R7.1 U1.55 | length 32.4
  L1 (Signal) w0.254: B6.2 B6.1 83.529,96.605 83.529,95.895 84.709,94.715 C12.1 84.709,94.515 83.685,93.491 83.685,92.983 R7.1@83.412,92.71 ; R7.1 R7.1@83.412,92.71 ; U1.55 99.845,85.956 96.649,89.152 88.521,89.152 84.963,92.71 R7.1@83.412,92.71
Buzzer1: R19.1 U1.34 | length 22.3
  L1 (Signal) w0.254: U1.34 104.865,75.839 106.152,75.839 v2(106.172,75.819) ; R19.1 v2(121.92,82.804)
  L4 (Signal) w0.254: v2(106.172,75.819) 111.125,80.772 120.523,80.772 121.92,82.169 v2(121.92,82.804)
Buzzer-: LS1.2 Q1.3 | length 8.1
  L1 (Signal) w0.254: Q1.3 113.797,89.349 LS1.2
BuzzerFET_Base: Q1.1 R19.2 | length 2.9
  L1 (Signal) w0.254: Q1.1 117.04,83.063 117.299,82.804 R19.2
GND: B1.1 B1.2 B2.3 B2.4 B3.3 B3.4 B4.3 B4.4 B5.3 B5.4 B6.3 B6.4 C1.1 C2.1 C3.1 C4.1 C5.1 C6.1 C7.1 C8.2 C9.2 C10.2 C11.2 C12.2 C13.1 C15.2 C16.1 C17.1 C18.1 C19.1 C20.1 C21.1 D1.K D2.2 IC1.2 P1.1 P2.2 P3.2 Q1.2 Q2.2 R4.2 R15.2 R16.2 R17.2 R22.1 R23.1 TP2.1 U1.9 U2.4 U3.3 U4.4 U5.4 | length 73.9
  L1 (Signal) w0.254: U3.3 127.381,98.171
  L1 (Signal) w0.3: B6.3 B6.3@86.209,96.925 ; B5.3 B5.3@92.273,97.008 ; 92.456,78.859 U1.9 ; B3.3@104.402,96.881 B3.3 ; B2.3@110.466,96.775 B2.3 ; B2.4 B2.4@110.823,103.632 ; IC1.2 IC1.2@117.475,101.004
  L1 (Signal) w0.4: 92.202,78.576 92.202,78.605 92.456,78.859 ; v1(110.49,74.549) 110.503,74.562 111.9,74.562 U2.4 ; 127.381,98.171 127.508,98.171
  L1 (Signal) w0.5: P3.2@83.216,66.39 P3.2 ; C1.1@83.339,76.986 C1.1 ; C1.1@83.463,76.986 85.752,76.986 C4.1@85.828,76.986 ; v1(83.947,83.947) C7.1 ; v1(83.947,86.233) C6.1 ; C4.1 C4.1@85.828,76.986 ; B6.3 B6.4 ; C12.2 v1(87.122,94.615) ; C3.1 C3.1@88.241,76.986 ; C2.1@90.678,76.962 C2.1@90.654,76.986 ; 92.202,78.576 92.202,77.279 91.909,76.986 C2.1 C2.1@90.654,76.986 ; B5.3 B5.4 ; C11.2 v1(93.218,94.615) ; C5.1 v1(92.71,70.231) ; B1.1@93.783,67.073 94.083,66.773 B1.1 B1.2 ; Q2.2@96.575,63.804 Q2.2 v1(96.586,65.085) ; C10.2 v1(99.263,94.615) ; B4.3@98.337,96.965 B4.3 B4.4 ; R23.1 R23.1@104.24,68.822 ; C9.2 v1(105.283,94.615) ; B3.3 B3.4 ; R4.2 v1(108.688,84.939) ; C21.1 C21.1@110.358,70.588 ; C8.2 v1(111.379,94.615) ; B2.3 B2.4 ; v1(113.919,103.632) C13.1 ; R22.1 R22.1@115.325,68.829 ; Q1.2 v1(115.697,85.852) ; C18.1@117.502,62 C18.1 C18.1@117.702,62 ; v1(117.602,85.09) C15.2 ; R17.2 121.388,73.633 121.885,74.13 122.263,74.13 v1(122.301,74.168) ; R16.2 v1(122.301,75.819) ; R15.2 v1(122.301,78.105) ; v1(123.571,83.058) 123.583,83.07 124.575,83.07 D1.K ; 127.508,98.171 v1(127.889,98.171) ; C17.1@127.785,95.608 C17.1 v1(128.651,95.758) ; C16.1 v1(128.778,103.632) ; C4.1@85.828,76.986 85.852,76.962 85.876,76.986 88.165,76.986 C3.1@88.241,76.986 ; C3.1@88.241,76.986 88.265,76.962 88.289,76.986 90.578,76.986 C2.1@90.654,76.986
  other v1: 120.904,58.166 123.444,58.166 127,58.166 120.904,59.436 123.444,59.436 127,59.436 106.426,60.96 107.442,60.96 117.094,60.96 118.11,60.96 94.083,63.373 114.681,69.85 115.697,69.85 103.632,69.977 104.775,69.977 109.093,70.612 111.379,70.612 120.269,70.739 122.555,70.739 84.582,76.962 89.535,76.962 91.821,76.962 87.086,77.003 110.696,100.255 86.106,100.278 92.253,100.278 98.401,100.278 104.548,100.278
  other v2: 107.188,65.151 108.839,65.151 118.237,65.151 119.888,65.151
Infra_Data: IC1.1 U1.50 | length 23
  L1 (Signal) w0.254: U1.50 102.368,84.882 102.368,86.747 105.918,90.297 108.712,90.297 114.935,96.52 IC1.1
InversePolarity: D2.1 F1.2 | length 3.1
  L1 (Signal) w0.5: D2.1 122.368,61.111 F1.2
LED: R6.2 U1.47 | length 25.1
  L1 (Signal) w0.254: U1.47 104.868,82.382 105.58,82.382 106.426,83.228 v2(106.426,85.217) ; v2(124.333,89.535) 124.333,89.482 124.587,89.228 R6.2
  L4 (Signal) w0.254: v2(106.426,85.217) 110.744,89.535 v2(124.333,89.535)
LED_Catode: D1.A R6.1 | length 2
  L1 (Signal) w0.254: D1.A R6.1
LED_Display_CS: P2.4 U1.33 | length 25.7
  L1 (Signal) w0.254: U1.33 105.295,75.359 108.518,72.136 123.571,72.136 125.73,74.295 P2.4
Light_Sensor_INT: R18.2 U1.49 U3.2 | length 31.2
  L1 (Signal) w0.254: U1.49 102.845,85.954 106.045,89.154 108.839,89.154 116.078,96.393 124.714,96.393 124.976,96.131 124.976,96.031 125.249,95.758 R18.2 125.449,95.758 126.611,96.92 U3.2
LM75BDP_A0: R15.1 U2.7 | length 5.1
  L1 (Signal) w0.254: U2.7 118.415,75.895 119.888,77.368 R15.1
LM75BDP_A1: R16.1 U2.6 | length 4
  L1 (Signal) w0.254: U2.6 118.694,75.235 119.256,75.796 119.865,75.796 R16.1
LM75BDP_A2: R17.1 U2.5 | length 4.1
  L1 (Signal) w0.254: U2.5 118.466,74.574 119.256,73.784 119.637,73.784 R17.1
MCU_ADC: R13.1 R24.2 U1.27 | length 13.8
  L1 (Signal) w0.254: U1.27 100.345,72.375 102.362,70.358 102.362,64.897 R24.2 R13.1
MCU_ADC_Controll: Q2.1 U1.26 | length 10.9
  L1 (Signal) w0.254: Q2.1 100.86,66.189 100.86,70.717 99.868,71.709 99.868,72.766 99.868,73.336 U1.26
MCU_I2C1_SCL: R2.2 U1.37 U2.1 U3.4 | length 46.1
  L1 (Signal) w0.254: U1.37 107.68,77.359 R2.2 110.437,77.343 110.691,77.089 v2(110.744,77.089) 110.782,77.051 110.782,76.963 111.188,76.556 U2.1 ; v2(127,99.949) 127.038,99.987 127.038,100.241 127.111,100.314 U3.4
  L4 (Signal) w0.254: v2(110.744,77.089) 123.571,77.089 127,80.518 v2(127,99.949)
MCU_I2C1_SDA: R3.2 U1.42 U2.2 U3.6 | length 47
  L1 (Signal) w0.254: U1.42 107.593,79.859 R3.2 109.601,79.756 110.49,78.867 v2(112.141,78.867) 113.284,77.724 113.284,76.233 113.026,75.975 111.992,75.975 U2.2 ; v2(125.476,99.822) 125.476,100.669 U3.6@126.099,101.292
  L4 (Signal) w0.254: v2(112.141,78.867) 112.16,78.886 123.209,78.886 125.476,81.153 v2(125.476,99.822)
MCU_NRST: B1.3 B1.4 C5.2 P1.2 R1.1 U1.12 | length 64.5
  L1 (Signal) w0.254: R1.1 91.008,66.548 B1.3 ; B1.4 B1.3 ; U1.12 93.368,77.336 94.08,77.336 v2(94.488,76.928) 94.488,74.676 91.21,71.398 C5.2 91.21,66.75 B1.3 ; v2(124.333,90.551) 125.095,90.551 P1.2
  L4 (Signal) w0.254: v2(94.488,76.928) 110.524,92.964 121.158,92.964 123.571,90.551 v2(124.333,90.551)
MCU_OSC32_IN: C6.2 U1.4 Y1.2 | length 11.2
  L1 (Signal) w0.254: C6.2 86.447,86.32 Y1.2 91.226,86.32 92.075,85.471 92.075,81.917 92.61,81.382 93.322,81.382 U1.4
MCU_OSC32_OUT: R5.1 U1.5 | length 2.5
  L1 (Signal) w0.254: R5.1 91.078,80.882 92.872,80.882 U1.5
MCU_SPI1_CLK: P2.5 P3.5 U1.18 | length 53.6
  L1 (Signal) w0.254: P3.5 85.168,62.484 v2(85.688,61.964) ; v2(95.123,71.374) 95.822,72.073 95.822,73.336 U1.18 ; v2(124.333,74.803) 126.365,76.835 P2.5
  L4 (Signal) w0.254: v2(85.688,61.964) 85.701,61.964 95.111,71.374 v2(95.123,71.374) 96.52,72.771 122.301,72.771 v2(124.333,74.803)
MCU_SPI1_MISO: P3.7 U1.23 | length 21.3
  L1 (Signal) w0.254: P3.7 85.954,59.944 v2(86.704,60.694) ; v2(96.139,70.104) 98.345,72.31 U1.23
  L4 (Signal) w0.254: v2(86.704,60.694) 86.717,60.694 96.127,70.104 v2(96.139,70.104) v2@96.101,70.066
MCU_SPI1_MOSI: P2.3 P3.6 U1.19 | length 52.2
  L1 (Signal) w0.254: P3.6 86.028,61.214 86.143,61.329 v2(86.196,61.329) ; v2(95.631,70.739) 96.345,71.453 U1.19 ; v2(125.095,71.755) P2.3
  L4 (Signal) w0.254: v2(86.196,61.329) 86.209,61.329 95.619,70.739 v2(95.631,70.739) 96.647,71.755 v2(125.095,71.755)
MCU_SWCLK: P1.3 R4.1 U1.46 | length 26.4
  L1 (Signal) w0.254: U1.46 106.016,81.859 107.596,83.439 R4.1 110.236,83.439 112.395,81.28 124.714,81.28 P1.3
MCU_SWDIO: P1.4 U1.45 | length 25.6
  L1 (Signal) w0.254: U1.45 106.437,81.359 107.247,82.169 109.22,82.169 111.379,80.01 125.984,80.01 P1.4
NRF_CE: P3.3 R12.2 U1.15 | length 16.8
  L1 (Signal) w0.254: P3.3 83.395,65.024 84.919,66.548 R12.2 85.952,66.548 86.741,67.337 86.741,71.247 91.353,75.859 U1.15
NRF_CSN: P3.4 U1.16 | length 17.5
  L1 (Signal) w0.254: P3.4 83.395,63.754 84.596,64.955 86.545,64.955 87.544,65.954 87.544,70.526 92.377,75.359 U1.16
NRF_IRQ: P3.8 U1.24 | length 22.7
  L1 (Signal) w0.254: P3.8 85.827,58.674 v2(87.212,60.059) ; v2(96.647,69.469) 98.845,71.667 U1.24 U1.24@98.868,73.336
  L4 (Signal) w0.254: v2(87.212,60.059) 87.225,60.059 96.635,69.469 v2(96.647,69.469) v2@96.609,69.431
TPS61023DRLR_3V3_FB: R21.1 R23.2 U5.1 | length 5.2
  L1 (Signal) w0.254: R23.2@104.029,67.433 R23.2 105.63,67.322 106.285,66.667 U5.1 106.47,69.086 R21.1
TPS61023DRLR_3V3_SW: L2.2 U5.5
TPS61023DRLR_5V_FB: R20.1 R22.2 U4.1 | length 5.3
  L1 (Signal) w0.254: R22.2@115.162,67.354 R22.2@115.17,67.346 ; R22.2 116.65,67.329 117.312,66.667 U4.1 117.497,69.197 R20.1
TPS61023DRLR_5V_SW: L1.2 U4.5
TSOP34838_VS: C13.2 IC1.3 R14.2 | length 5.4
  L1 (Signal) w0.254: C13.2 R14.2 118.515,102.465 IC1.3
XTRAL_IN: C7.2 R5.2 Y1.1 | length 6.1
  L1 (Signal) w0.254: C7.2 86.487,83.82 Y1.1 89.305,83.717 R5.2
pads on no net: U1.1 U1.2 U1.3 U1.10 U1.11 U1.13 U1.14 U1.17 U1.20 U1.21 U1.22 U1.25 U1.28 U1.29 U1.30 U1.31 U1.32 U1.35 U1.36 U1.38 U1.39 U1.40 U1.41 U1.43 U1.44 U1.48 U1.56 U1.57 U1.58 U1.59 U1.60 U1.61 U1.62 U1.63 U1.64 U2.3

## Polygon pours and split planes (outlines as drawn)
GND on L1 (Signal) "GND_L01_P012" (solid, pour order 12): 129.758,57.658 129.499,57.399 129.497,57.403 105.538,57.403 105.324,57.617 105.324,61.468 106.426,62.484 107.569,62.484 108.585,61.468 115.951,61.468 116.967,62.484 118.237,62.484 120.777,59.944 126.746,59.944 127.127,60.325 129.54,60.325 129.754,60.111 129.758,60.111
GND on L1 (Signal) "GND_L01_P006" (solid, pour order 6): 109.671,64.923 109.337,66.014 106.604,65.995 106.604,64.643 109.671,64.643
+5 on L1 (Signal) "+5_L01_P005" (solid, pour order 5): 129.756,65.409 129.631,65.284 129.631,65.278 125.095,65.278 123.674,66.699 120.762,66.699 120.383,66.32 118.618,66.32 118.618,69.977 120.135,69.977 120.569,69.542 125.022,69.542 126.746,67.818 129.645,67.818 129.665,67.818 129.756,67.715
AA_Battery_+ on L1 (Signal) "AA_BATTERY_+_L01_P003" (solid, pour order 3): 124.518,61.722 124.01,62.23 118.999,62.23 118.237,62.992 116.967,62.992 115.697,61.722 108.839,61.722 107.823,62.738 103.886,62.738 103.886,64.643 105.537,66.294 106.81,66.294 106.81,65.516 106.603,65.509 106.608,64.643 114.808,64.643 116.604,66.294 117.217,66.311 117.836,66.311 117.852,65.516 117.634,65.509 117.634,64.897 117.888,64.643 129.501,64.643 129.54,64.605 129.756,64.389 129.756,61.214 129.756,61.176 129.54,60.96 126.829,60.96 126.576,61.733 125.222,61.722
GND on L1 (Signal) "GND_L01_P014" (solid, pour order 14): 124.333,71.374 124.436,71.271 126.687,71.271 126.688,71.272 126.72,71.273 127.635,70.358 129.756,70.358 129.754,67.945 126.873,67.945 125.095,69.723 120.777,69.723 120.269,70.231 117.094,70.231 116.586,69.723 116.586,69.088 115.824,68.326 114.554,68.326 112.776,70.104 106.172,70.104 105.664,69.596 105.664,68.707 105.283,68.326 103.251,68.326 102.743,68.834 102.743,71.12 102.997,71.374
+3V3 on L1 (Signal) "+3V3_L01_P001" (solid, pour order 1): 108.567,66.495 108.567,66.534 108.968,66.533 110.871,68.707 110.871,69.596 107.569,69.596 107.569,66.495
GND on L1 (Signal) "GND_L01_P008" (solid, pour order 8): 117.701,65.805 120.451,65.805 120.68,65.057 120.68,64.673 120.65,64.643 120.648,64.645 117.701,64.645
TPS61023DRLR_3V3_SW on L1 (Signal) "TPS61023DRLR_3V3_SW_L01_P004" (solid, pour order 4): 107.615,66.329 108.281,66.33 108.322,66.289 108.692,66.283 108.776,66.33 109.396,66.329 109.524,66.421 112.395,66.421 112.395,64.938 109.673,64.938 109.357,66.001 107.624,66.001
TPS61023DRLR_5V_SW on L1 (Signal) "TPS61023DRLR_5V_SW_L01_P000" (solid, pour order 0): 118.618,66.279 120.381,66.279 120.65,66.548 123.444,66.548 123.444,65.057 120.68,65.057 120.391,66.056 118.618,66.056
+3V3 on L3 (+3V3) "+3V3_L03_P011" (solid, pour order 11): 82,58 82,104 cw(c83,104) 83,105 129,105 cw(c129,104) 130,104 130,58 cw(c129,58) 129,57 83,57 cw(c83,58)
GND on L2 (GND) "GND_L02_P010" (solid, pour order 10): 82,58 82,104 cw(c83,104) 83,105 129,105 cw(c129,104) 130,104 130,58 cw(c129,58) 129,57 83,57 cw(c83,58)

## Silkscreen, mask and mechanical layers (free items; w line width, h text height)
Top Overlay:
  text "SWD" at 126.693,88.572 h0.8 r90
  text "LED Display" at 126.393,68.76 h0.9 r90
  text "NRF24" at 84.508,61.542 h0.8 r270
Top Solder:
  the board outline again, w0.254
Mechanical 1:
  lines w0.254: 81.026,104.61 ccw(c81.026,104.61) 81.026,104.61 ; 81.026,104.61 cw(c82.296,104.61) 82.296,105.88 129.756,105.88 cw(c129.756,104.61) 131.026,104.61 131.026,57.15 cw(c129.756,57.15) 129.756,55.88 82.296,55.88 cw(c82.296,57.15) 81.026,57.15 81.026,104.61

## Text inside footprints (layer, text, board x,y; h text height)
U2: Mechanical 13 "*" at 112.56,75.768 h1.27